# Altium PCB DC_SIGNAL_FILTER.PcbDoc
Units mil, origin at the board's own origin, x right, y up, seen from the top; angles counter-clockwise.
Board outline 1310 x 1130 mil, 2 copper layers (Top Layer, Bottom Layer); 7 components, 5 nets, 24 pads, 2 vias.
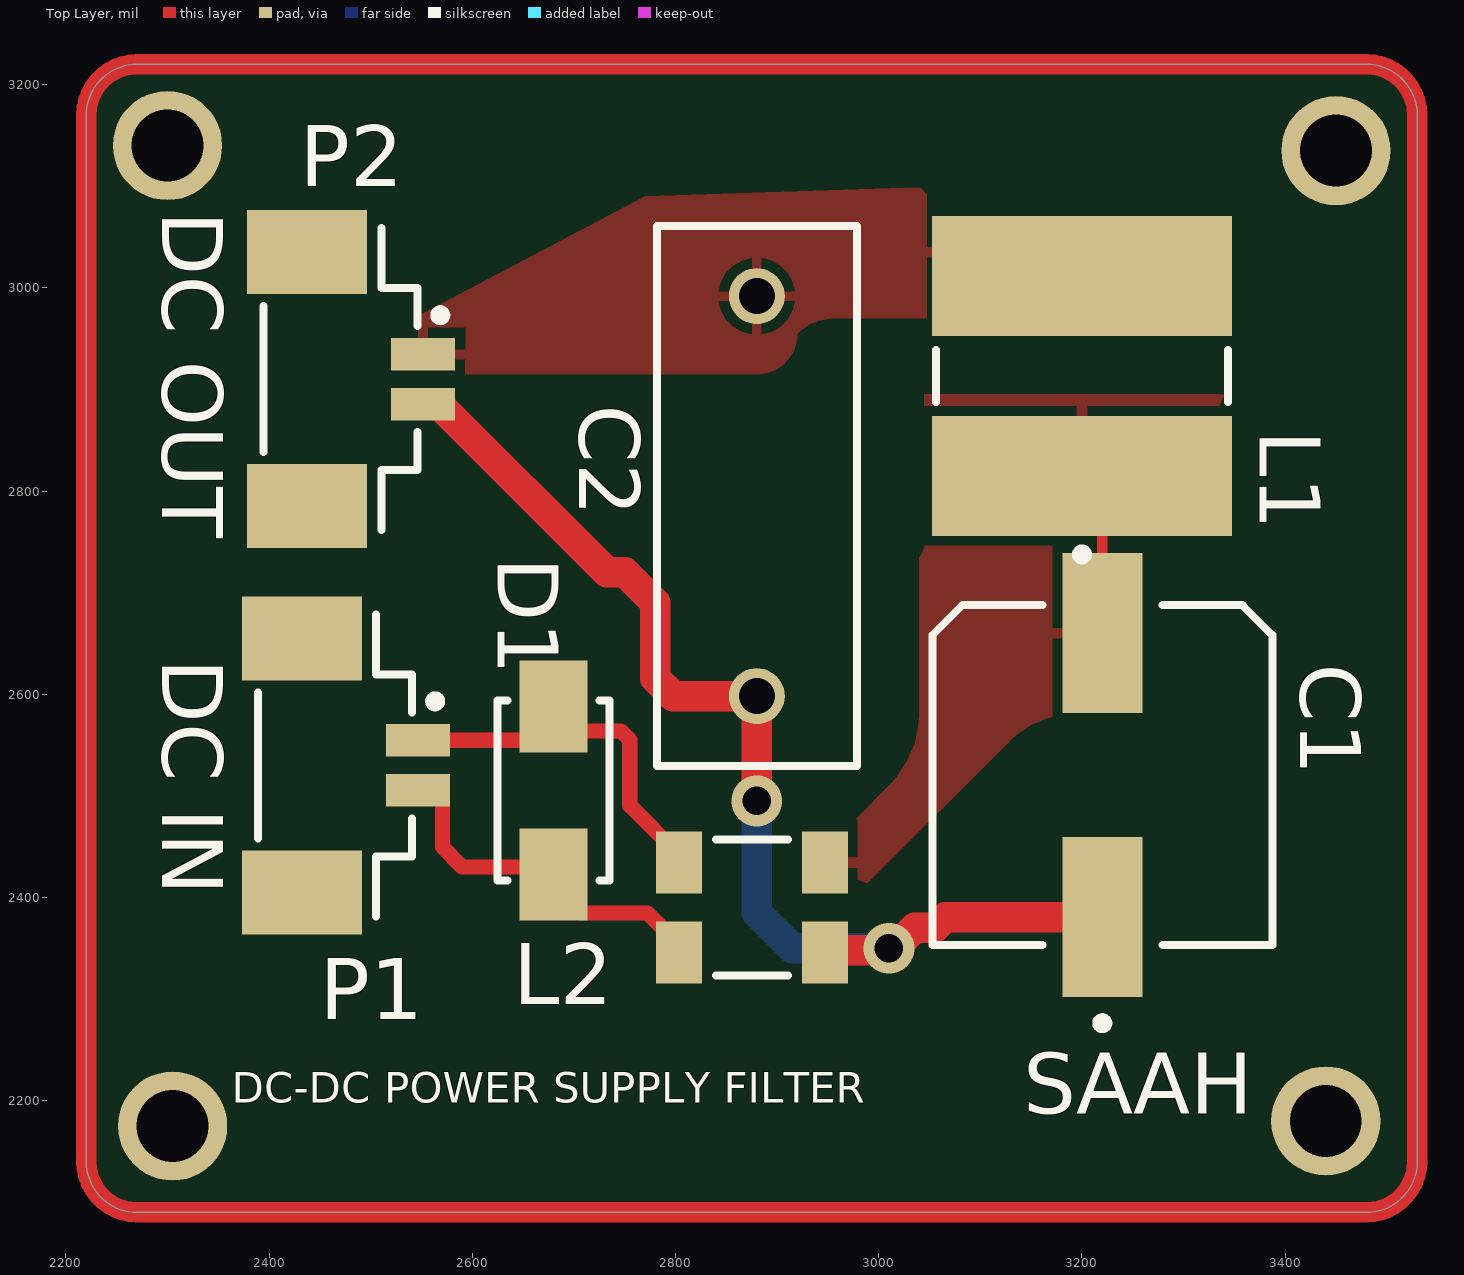
[diagram p0: Top Layer view]
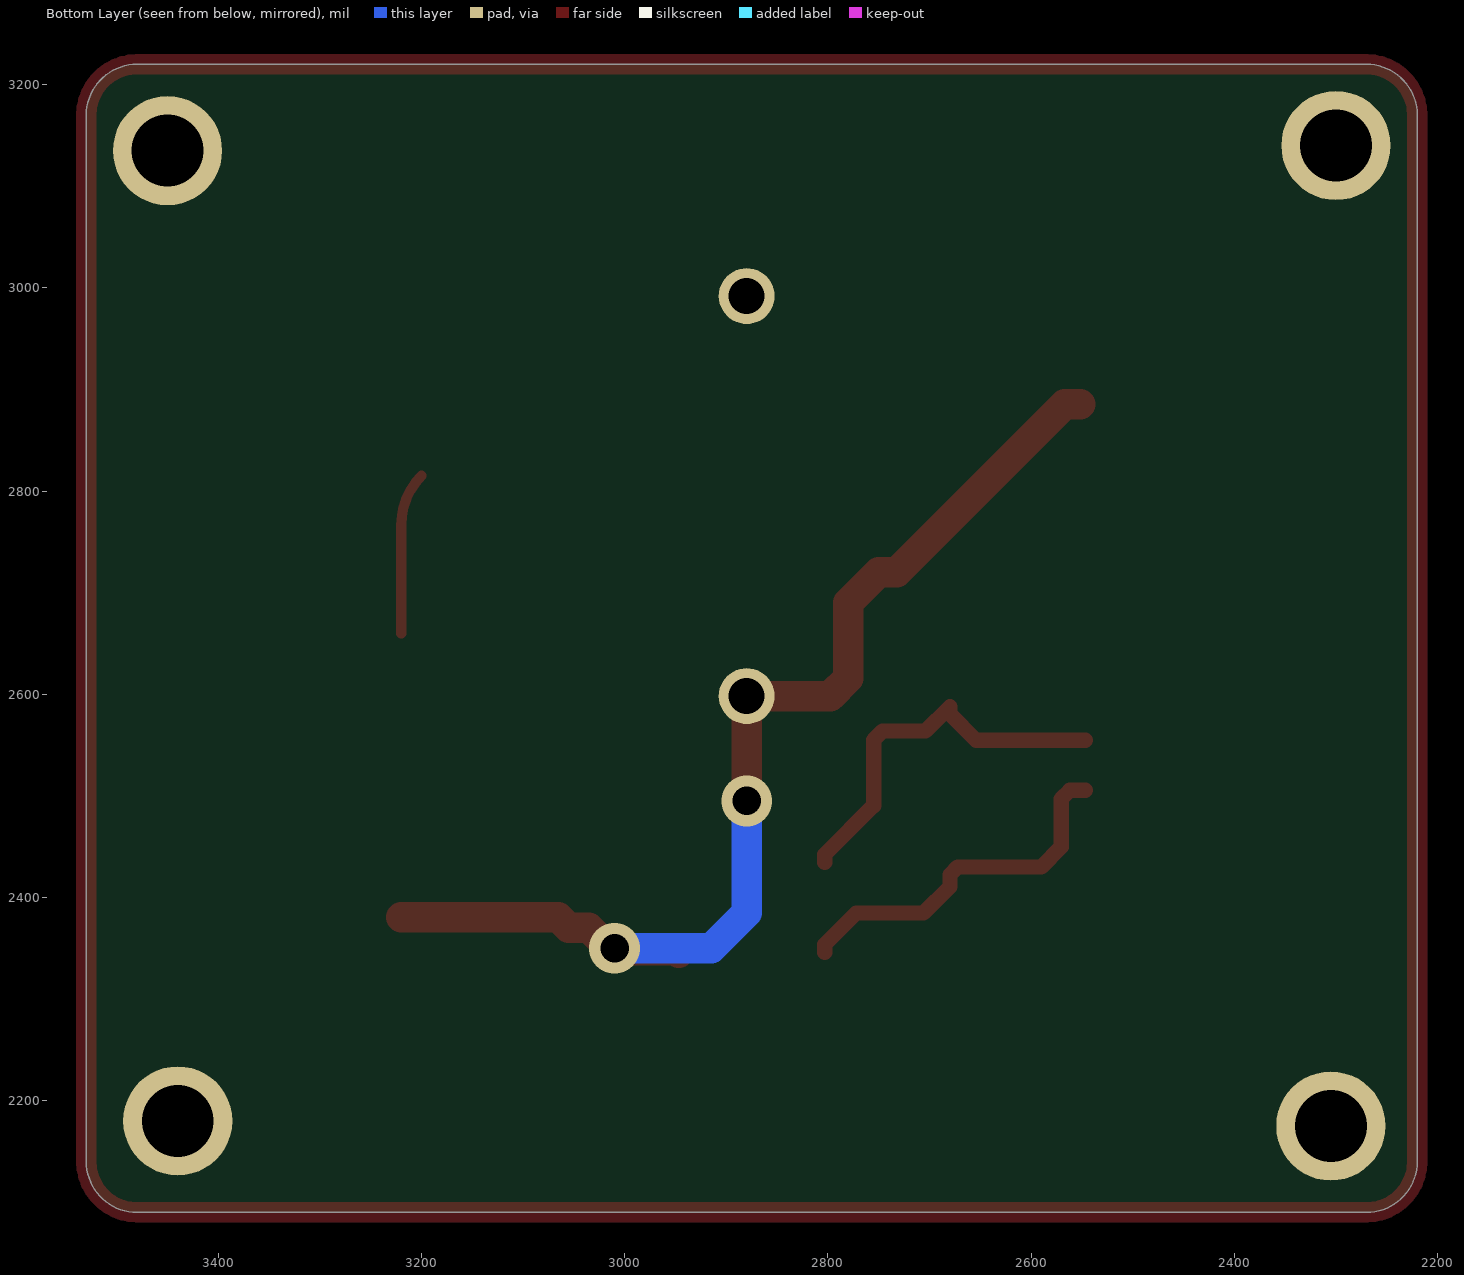
[diagram p1: Bottom Layer view, seen from below]
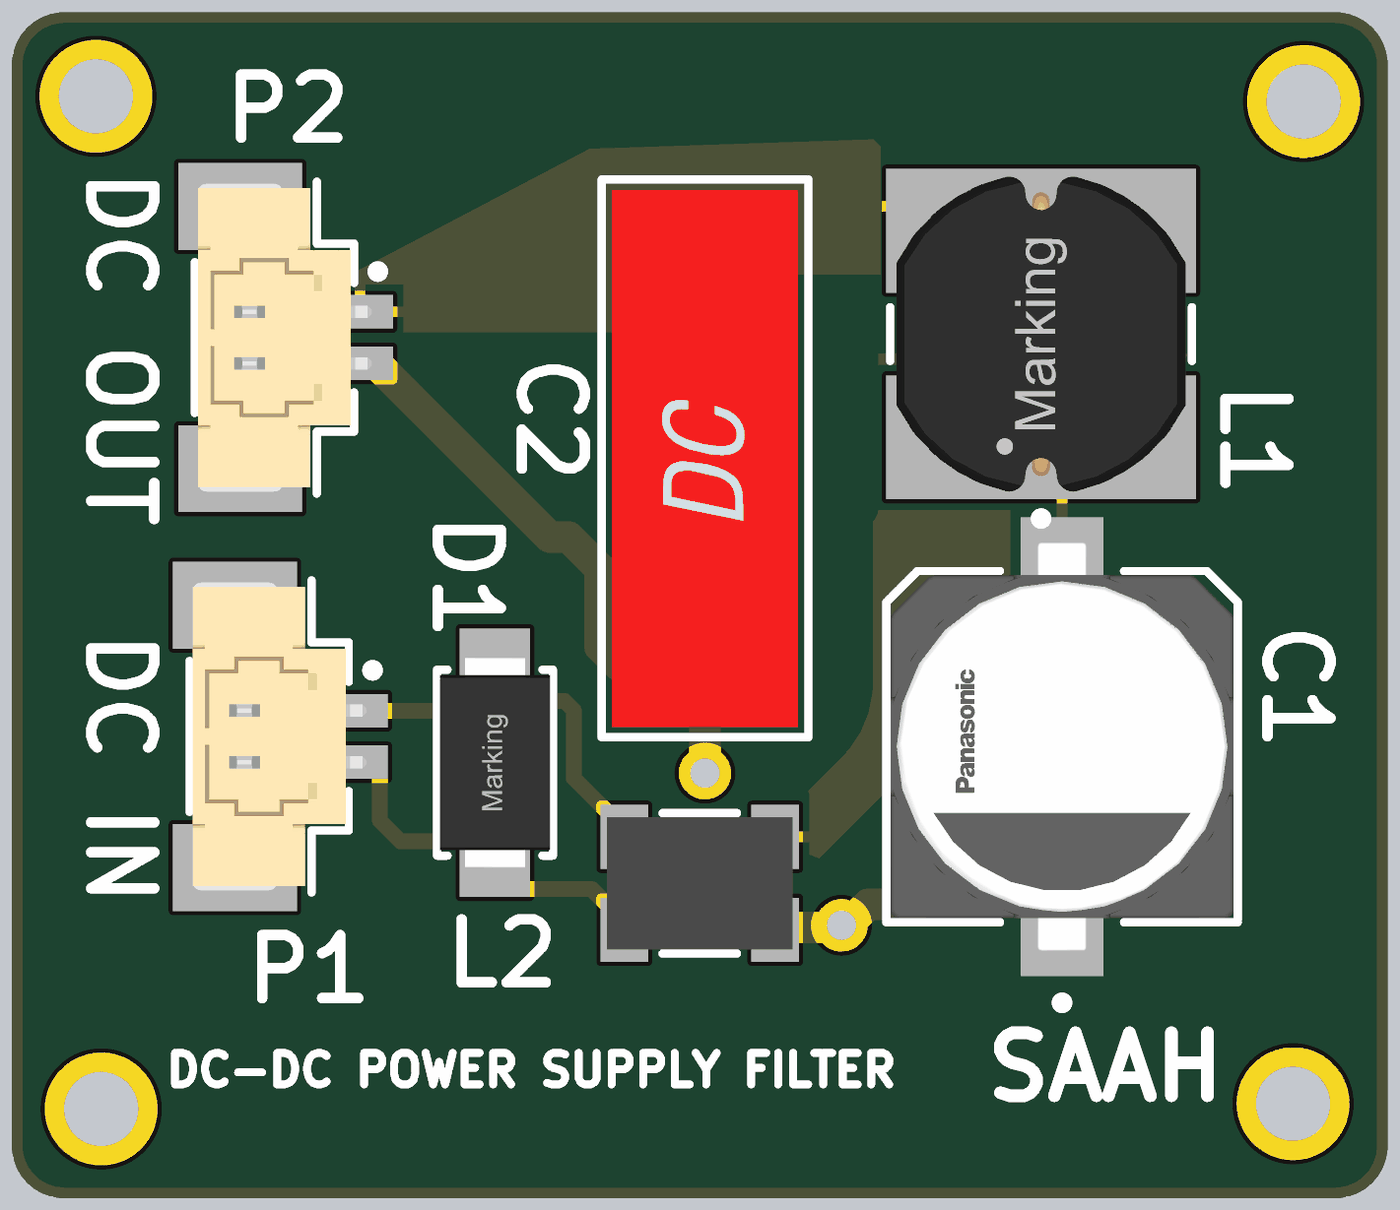
[diagram p2: 3D render of the assembled board from above, using the file's embedded part models]

## Layer stack, top to bottom
Top Solder: solder mask 0.4, Solder Resist, Dk 3.5
Top Layer: signal copper 1.4
Dielectric 1: dielectric 12.6, FR-4, Dk 4.8
Bottom Layer: signal copper 1.4
Bottom Solder: solder mask 0.4, Solder Resist, Dk 3.5

## Board outline
2220,2140 2220,3170 cw(c2270,3170) 2270,3220 3480,3220 cw(c3480,3170) 3530,3170 3530,2140 cw(c3480,2140) 3480,2090 2270,2090 cw(c2270,2140)

## Design rules (kind name [scope] priority, off if disabled: settings)
Clearance [All] p1: gap=10 ignorepadtopadclearanceinfootprint=FALSE
PolygonConnect [All] p1: connectstyle=Relief reliefconductorwidth=10 reliefentries=4 polygonreliefangle="90 Angle" airgapwidth=10
RoutingVias [All] p1: holewidth=28 width=50 viastyle="Through Hole" minholewidth=28 minwidth=50 maxholewidth=28 maxwidth=50
SolderMaskExpansion [All] p1: expansion=4 istentingtop=FALSE
Width [All] p1: maxlimit=50 minlimit=10 preferedwidth=30 minimp=50.000000 maximp=50.000000 favimp=50.000000
30 further rules are at their usual default settings.

## Components (designator, comment, footprint, x,y, rotation, side; value= is the part's Value field where it differs from the comment)
C1 "10uF" FP-HDF-MFG 3220,2520.24 r90 top
C2 "22nF" WCAP-FTXX_L13W4.5H9.5_CS 2880,2795 r90 top
D1 "824501500" WE-TVSP_DO-214AC_Bidirectional 2680,2505 r90 top
L1 "768775282" "WE-PD2 HV_7850" 3200,2913.43 r90 top
L2 "744235251" WE-CNSW_1812 2875,2390 r0 top
P1 "653102124022" 653102124022 2465,2530 r270 top
P2 "653102124022" 653102124022 2470,2910 r270 top

## Footprints (in the part's own frame and the unit in brackets; to place one, negate y for a bottom-side part, rotate by r counter-clockwise, add the part's x,y. Pads: shape width x height; smd on the part's side, far side on the other; paste and mask are expansions set on the pad)
653102124022 [mm] "1.25mm SMT Male Vertical Shrouded Header, 2p"
  rect 0.81x1.6 smd: 1(-0.625,2.07) 2(0.625,2.07)
  rect 2.1x3 smd: MP1(-3.175,-0.83) MP2(3.175,-0.83)
  silkscreen extent -3.77,-1.92 3.77,2.62, body extent -3.72,-1.85 3.72,2.36, height 4.74
FP-HDF-MFG [mm]
  rect 4x2 smd paste+0 mask+0: 1(-3.55,0) 2(3.55,0)
  silkscreen extent -6.32,-4.25 4.25,4.25, body extent -5.8,-4.5 5.8,4.5, height 0.25
WCAP-FTXX_L13W4.5H9.5_CS [mm] "Film Capacitors, 13x4.5x9.5mm"
  round 1.4 hole 0.9: 1(-5,0) 2(5,0)
  silkscreen extent -6.75,-2.5 6.75,2.5, body extent -6.5,-2.25 6.5,2.25, height 9.55
WE-CNSW_1812 [mm] "SMT Common Mode Line Filter, 4-leads, body 4.50x3.20mm"
  rect 1.15x1.55 smd: 1(-1.825,-1.125) 2(1.825,-1.125) 3(1.825,1.125) 4(-1.825,1.125)
  silkscreen extent -0.9,-1.7 0.9,1.7, body extent -2.25,-1.6 2.25,1.6, height 2.84
"WE-PD2 HV_7850" [mm] "SMT High Voltage Power Inductor, 2-Leads, body 7.80x7.00mm"
  rect 3x7.5 smd: 1(-2.5,0) 2(2.5,0)
  silkscreen extent -4.59,-3.65 0.65,3.65, body extent -3.81,-3.5 3.81,3.5, height 4.9
WE-TVSP_DO-214AC_Bidirectional [mm] "Power TVS Diode, 2-Leads. body 4.24x2.67mm"
  rect 2.3x1.7 smd: 1(-2.1,0) 2(2.1,0)
  silkscreen extent -2.25,-1.4 2.25,1.4, body extent -2.56,-1.33 2.56,1.34, height 2.24

## Part data
C1: library part CMP-05427-000023-1, "CAP ALUM 10UF 20% 100V SMD", Case/Package=Radial, Dielectric Material=Aluminium, ESR (Equivalent Series Resistance)=1.5R, Leakage Current=3uA, Max Operating Temperature=105°C, Min Operating Temperature=-40°C, Package Quantity=1, Ripple Current=55mA, Tolerance=20%, Voltage=100V, Capacitance=10uF, Construction=Cylindrical, Contact Plating=Tin, Diameter=8mm, Dissipation Factor=0.18%, Height=10.2mm, Height - Seated (Max)=0.402inch, Impedance=1.5R, Lead Free="Lead Free", Lead Pitch=3.1mm, Length=10.2mm, Life (Hours)=5000Hour, Mount="Surface Mount", Number of Pins=2, Packaging="Tape and Reel", Polarity=Polar, Radiation Hardening=No, Ripple Current (AC)=55mA, RoHS Compliant=Yes, Series=HD, Termination=SMD/SMT, Voltage Rating=100V, Voltage Rating (DC)=100V
C2: library part CMP-03913-51400141-2, "890334023011CS WCAP-FTXX Film Capacitor 22nF 310Vac", Case/Package=Radial, Dielectric=PP, Insulation Resistance=30GΩ, Max Operating Temperature=105°C, Min Operating Temperature=-40°C, Tolerance=10%, Voltage Rating=310V, Capacitance=22nF, Dielectric Material=PP, Height=9.5mm, Height - Seated (Max)=10.0076mm, Hole Diameter=900µm, Lead Pitch=10.0076mm, Length=13mm, Mount="Through Hole", NexarPartId=51400141, Packaging=Carton, Pin Length=4mm, Pitch=10mm, REACH SVHC=Unknown, RoHS=Compliant, Termination="PC Pins", Voltage Rating (AC)=310V, Voltage Rating (DC)=310V, Width=4.5mm
D1: library part CMP-03913-71101561-1, "824501500 WE-TVSP Power TVS Diode", Breakdown Voltage=6.7V, Clamping Voltage=9.2V, Leakage Current=1.6mA, Max Operating Temperature=150°C, Min Operating Temperature=-65°C, Peak Pulse Current=43.5A, Peak Pulse Power=400W, Power Line Protection=No, Reverse Standoff Voltage=5V, Composition=Zener, Height=2.25mm, Length=4.24mm, Max Breakdown Voltage=6.7V, Min Breakdown Voltage=6.7V, Mount="Surface Mount", NexarPartId=71101561, Number of Bidirectional Channels=1, Number of Pins=2, Packaging="Cut Tape", Polarity=Bidirectional, REACH SVHC=Unknown, RoHS=Compliant, Width=2.67mm
L1: library part CMP-1386-00005-3, Ambient Temperature Range High=85°C, Ambient Temperature Range Low=-40°C, Case/Package=7850, Current Rating=350mA, DC Resistance (DCR)=2.35Ω, Inductance=820µH, Inductance Tolerance=10%, Max Operating Temperature=125°C, Self Resonant Frequency=2.6MHz, Series Resistance=2.77Ω, Test Frequency=100kHz, Composition=Wirewound, Core Material=Ferrite, Height=5mm, Length=7mm, Min Operating Temperature=-40°C, NexarPartId=24533376, Packaging="Tape & Reel (TR)", RMS Current (Irms)=350mA, RoHS=Compliant, Saturation Current=350mA, Tolerance=10%, Width=7.8mm
L2: library part CMP-207849-000006-2, "CMC 250UH 200MA 2LN SMD AEC-Q200", Ambient Temperature Range High=85°C, Ambient Temperature Range Low=-40°C, Current Rating=200mA, Inductance=250µH, Max Operating Temperature=125°C, Series Resistance=1.6Ω, Test Frequency=10kHz, Tolerance=25%, Voltage Rating=60V, Composition=Wirewound, Height=2.8mm, Length=4.5mm, Min Operating Temperature=-40°C, NexarPartId=110288118, RMS Current (Irms)=200mA, RoHS=Compliant, Width=3.2mm
P1 P2: library part CMP-1502-00757-2, Color="Beige, White", Contact Resistance=20mΩ, Current Rating=1A, Flammability Rating="UL94 V-0", Insulation Resistance=100MΩ, Max Operating Temperature=85°C, Min Operating Temperature=-40°C, Operating Supply Voltage=125V, Connector Type="Male Pin", Contact Gender=Male, Contact Material=Copper, Contact Mating Length=2.159mm, Contact Plating=Tin, Gender=Male, Height=4.75mm, Housing Material=Nylon, Insulation=Insulated, Lead Pitch=1.25mm, Length=7.25mm, Mount="Surface Mount", NexarPartId=18818273, Number Of Contacts=2, Number of Pins=2, Number of Positions=2, Number Of Rows=1, Orientation=Vertical, Packaging="Tape and Reel", Pitch=1.25mm, REACH SVHC=Unknown, RoHS=Compliant, Termination=SMD/SMT, Voltage Rating=125V, Width=7.25mm

## Free pads (board coordinates)
  round 107.48 hole 70.71: 3(3440,2180) 4(3450,3135) 5(2300,3140) 6(2305,2175)

## Via types
v1: diameter 50, hole 28, Top Layer to Bottom Layer, 2 vias

## Nets (pads, with @x,y where several pads share a name; then routed paths per layer and width w, separated by ;. In a path a pad name is that pad's centre, name@x,y a point inside that pad or via, vN(x,y) a via of type N, cw(c..) or ccw(c..) an arc to the next point about the centre after c; other vN are vias at no path point)
NetC1_1: C1.1 C2.1 L2.2 P2.2 | length 1116.2
  Top Layer w30: P2.2 2567.05,2885.39 2732.44,2720 2750,2720 2780,2690 2780,2615.72 2797.57,2598.15 C2.1 ; v1(2880,2495) C2.1@2880,2578.15 ; L2.2 2949,2347.85 3007.85,2347.85 v1(3010,2350) 3015.41,2350 3035.41,2370 3055,2370 3065.47,2380.47 C1.1
  Bottom Layer w30: v1(2880,2495) 2880,2385 2915,2350 v1(3010,2350)
NetC1_2: C1.2 L1.1 L2.3 | length 160.3
  Top Layer w10: L1.1 cw(c3151.72,2766.72) 3220,2766.72 C1.2
NetC2_2: C2.2 L1.2 P2.1
NetD1_1: D1.1 L2.1 P1.2 | length 362.1
  Top Layer w15: P1.2 2562.05,2505.39 2570.49,2496.95 2570.49,2449.51 2590,2430 2672.32,2430 D1.1 2680,2410.51 2705.96,2384.55 2772.19,2384.55 2803.15,2353.58 L2.1
NetD1_2: D1.2 L2.4 P1.1 | length 380.6
  Top Layer w15: P1.1 2654.04,2554.61 2680,2580.57 D1.2 2703.89,2563.79 2746.21,2563.79 2755,2555 2755,2490.31 2803.15,2442.17 L2.4
pads on no net: P1.MP1 P1.MP2 P2.MP1 P2.MP2
copper on no net: | length 4794.2
  Top Layer w20: 2220,2140 ccw(c2270,2140) 2270,2090 3480,2090 ccw(c3480,2140) 3530,2140 3530,3170 ccw(c3480,3170) 3480,3220 2270,3220 ccw(c2270,3170) 2220,3170 2220,2140

## Polygon pours and split planes (outlines as drawn)
NetC1_2 on Top Layer "NETC1_2_L01_P005" (solid, pour order 5): 2920,2400 2975,2400 3130.25,2555.25 cw(c3190,2495.5) 3190,2580 3257.93,2580 ccw(c3257.93,2597.07) 3270,2585 ccw(c3257.93,2597.07) 3275,2597.07 3275,2710 3280.71,2715.71 cw(c3351.42,2645) 3351.42,2745 3355,2745 3355,2890 ccw(c3342.93,2877.93) 3342.93,2895 3045,2895 3045,2747.07 cw(c3027.93,2747.07) 3040,2735 3040,2581.42 cw(c2940,2581.42) 3010.71,2510.71 2970,2470 2920,2470
NetC2_2 on Top Layer "NETC2_2_L01_P000" (solid, pour order 0): 2519.12,2958.04 ccw(c2527.06,2942.93) 2510,2942.93 2510,2920 ccw(c2515,2920) 2515,2915 2880,2915 ccw(c2880,2955) 2920,2955 cw(c2956.21,2918.79) 2956.21,2970 3370,2970 ccw(c3370,2980) 3380,2980 3380,3105 ccw(c3375,3105) 3374.79,3110 2770,3090

## Silkscreen, mask and mechanical layers (free items; w line width, h text height)
Top Overlay:
  text "DC OUT" at 2295,3075.2 h60 r270
  text "DC IN" at 2295,2634.72 h60 r270
  text "DC-DC POWER SUPPLY FILTER" at 2363,2198 h30
  text "SAAH" at 3142,2187 h60